# Altium PCB Deploy.PcbDoc
Units mm, origin at the board's own origin, x right, y up, seen from the top; angles counter-clockwise.
Board outline 60 x 60 mm, 2 copper layers (Top Layer, Bottom Layer); 49 components, 40 nets, 274 pads, 38 vias.
Unrouted connection lines stored in the file: 5.
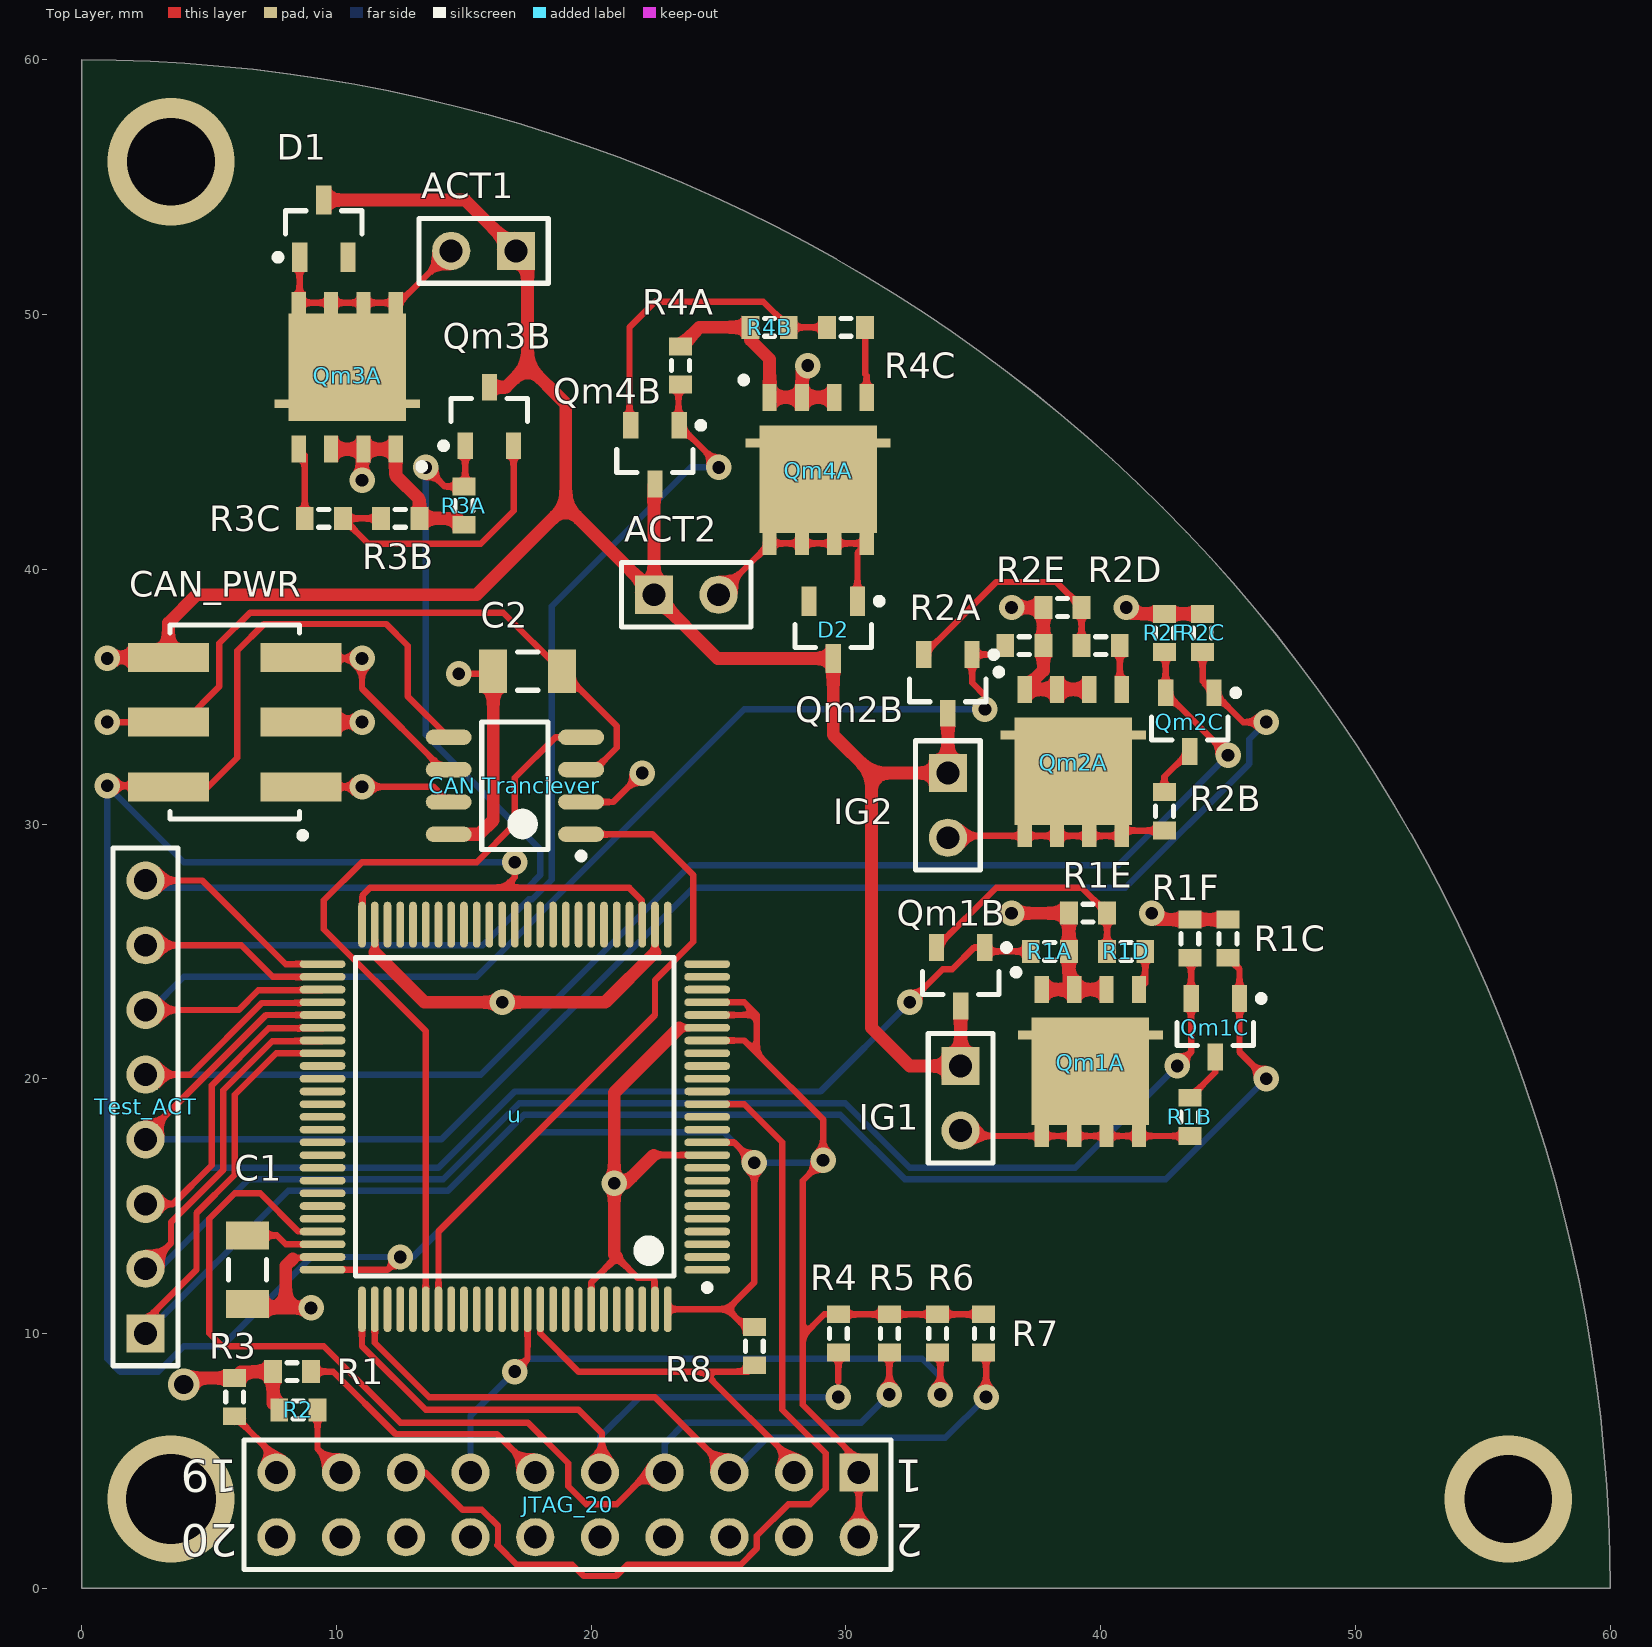
[diagram p0: Top Layer view]
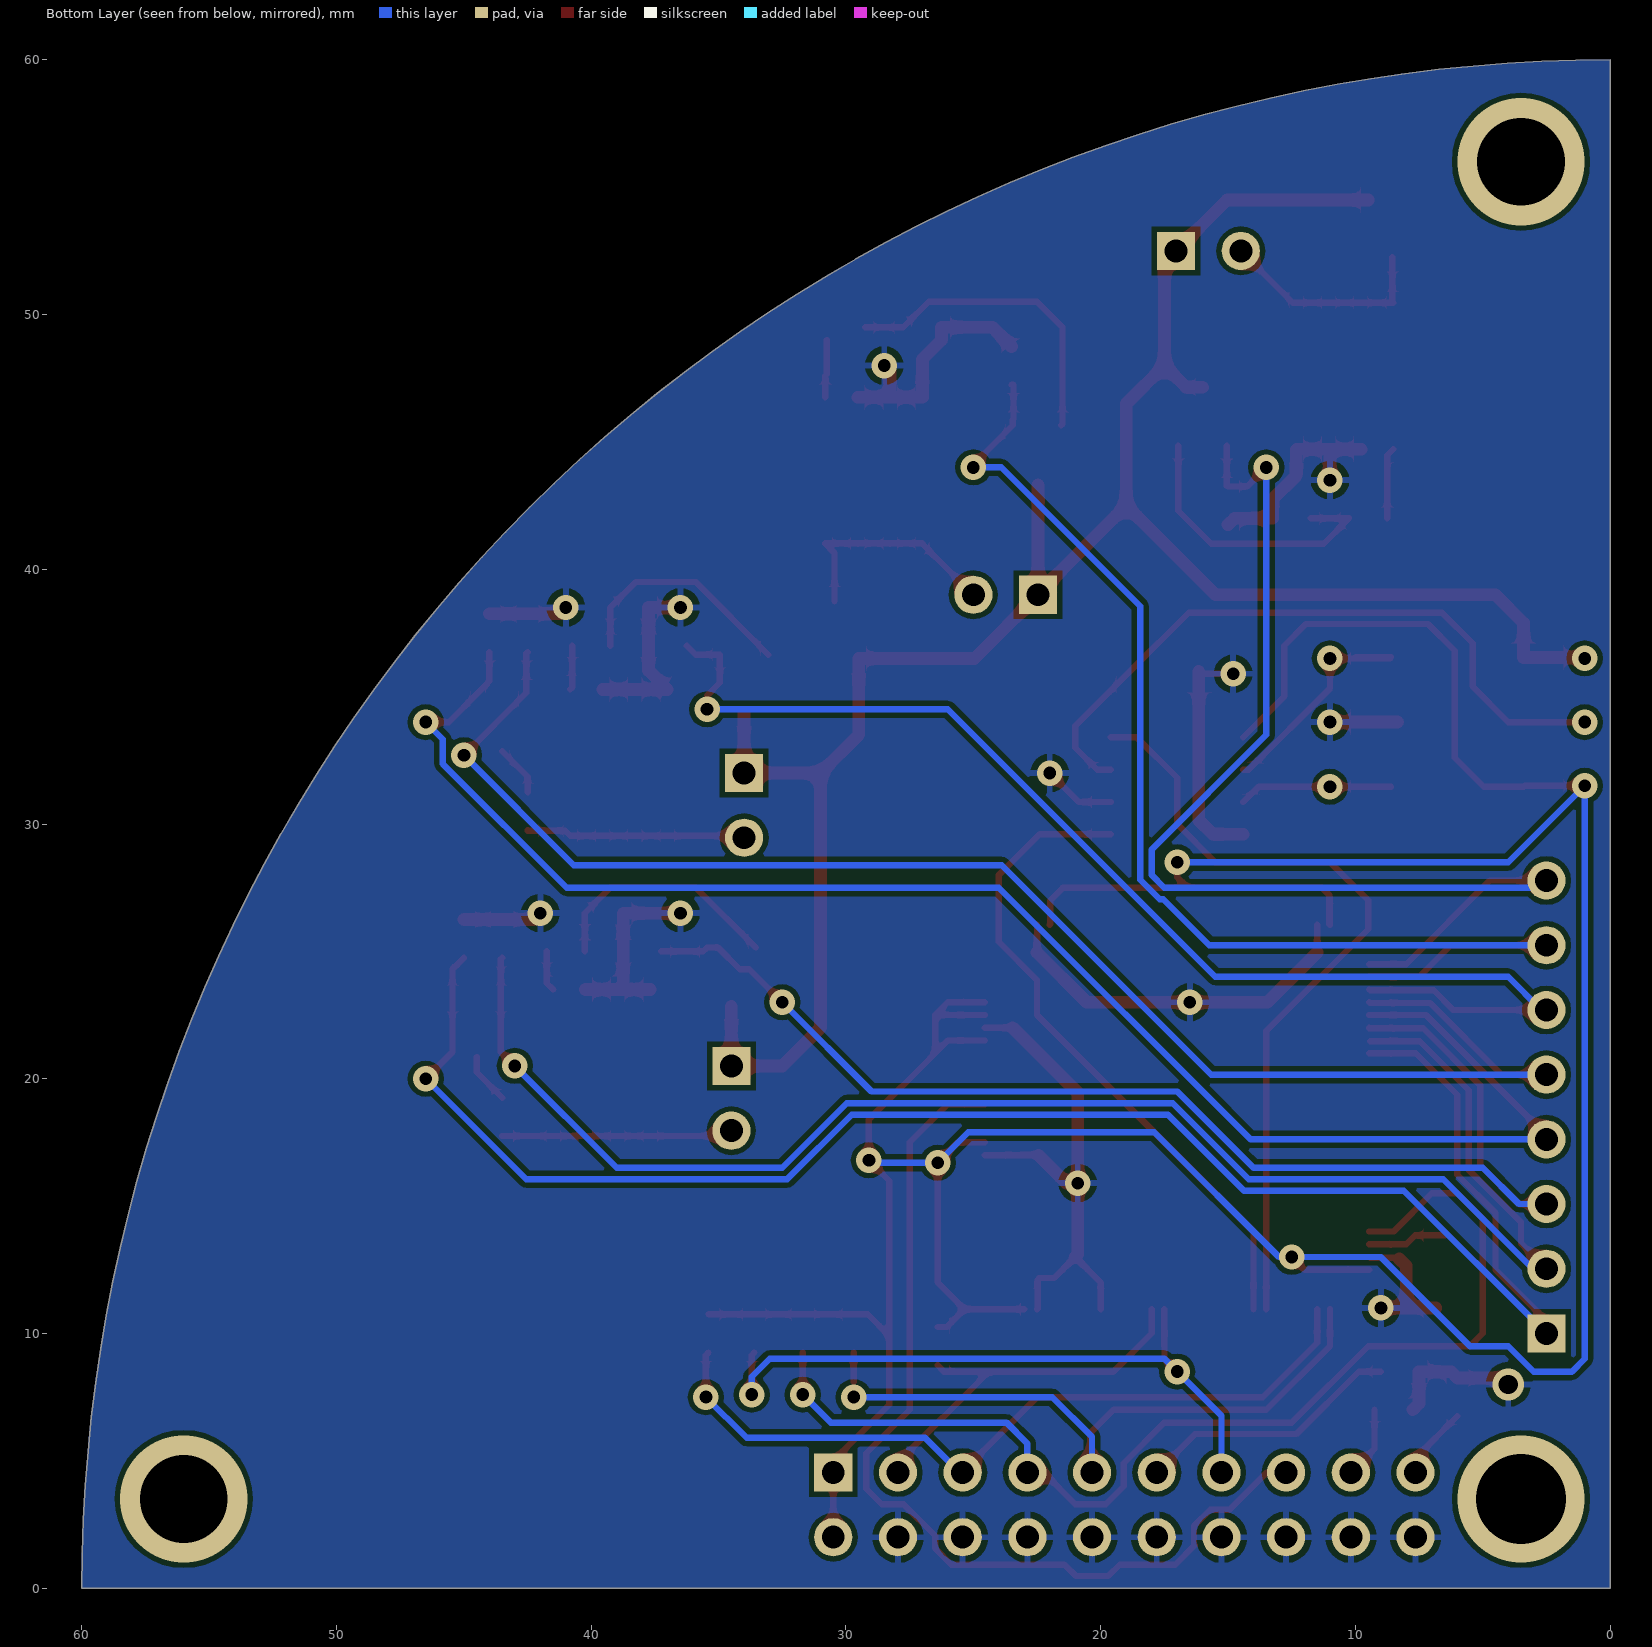
[diagram p1: Bottom Layer view, seen from below]

## Layer stack, top to bottom
Top Solder: solder mask 0.0102, Solder Resist, Dk 3.5
Top Layer: signal copper 0.0356
Dielectric 1: dielectric 0.32, FR-4, Dk 4.8
Bottom Layer: signal copper 0.0356
Bottom Solder: solder mask 0.0102, Solder Resist, Dk 3.5

## Board outline
0,60 cw(c0,0) 60,0 0,0

## Design rules (kind name [scope] priority, off if disabled: settings)
Clearance [All] p1: gap=0.2
Clearance Clearance_PWR [(InNet('ACT 12V') OR InNet('GND'))] p2: gap=0.25
ComponentClearance [All] p1: gap=0.25 collisioncheckmode=3 verticalgap=0.25 showdistances=FALSE
Height [All] p1: minheight=0 maxheight=30 prefheight=12.7
HoleSize [All] p1: absolutevalues=TRUE maxlimit=5 minlimit=0.025 maxpercent=80.000 minpercent=20.000
PlaneClearance [All] p1: clearance=1
PlaneConnect [All] p1: planeconnectstyle=Relief reliefexpansion=0.5 reliefentries=4 reliefconductorwidth=0.25 reliefairgap=0.25
PolygonConnect [All] p1: connectstyle=Relief reliefconductorwidth=0.25 reliefentries=4 polygonreliefangle="90 Angle" airgapwidth=0.25
RoutingCorners [All] p1: cornerstyle=45-Degree minsetback=0.25 maxsetback=0.25
RoutingVias [All] p1: holewidth=0.5 width=1 viastyle="Through Hole" minholewidth=0.5 minwidth=1 maxholewidth=0.5 maxwidth=1
SilkToSilkClearance [All] p1: silktosilkclearance=0
SolderMaskExpansion [All] p1: expansion=0.1
Width Width_PWR [(InNet('ACT 12V') OR InNet('GND'))] p1: maxlimit=0.5 minlimit=0.25 preferedwidth=0.5 minimp=50.000000 maximp=50.000000 favimp=50.000000
Width [All] p2: maxlimit=0.25 minlimit=0.25 preferedwidth=0.25
23 further rules are at their usual default settings.

## Classes and differential pairs
net class PWR: GND NetACT1_2 NetACT2_2
component class Actuators: ACT1 ACT2 D1 D2 IG1 IG2 Qm1A Qm1B Qm1C Qm2A Qm2B Qm2C Qm3A Qm3B Qm4A Qm4B R1A R1B R1C R1D R1E R1F R2A R2B R2C R2D R2E R2F R3A R3B R3C R4A R4B R4C
component class Sheet1: C1 C2 "CAN Tranciever" CAN_PWR JTAG_20 R1 R2 R3 R4 R5 R6 R7 R8 u

## Components (designator, comment, footprint, x,y, rotation, side; value= is the part's Value field where it differs from the comment)
ACT1 "Header 2" HDR1X2 17.04,52.5 r180 top
ACT2 "Header 2" HDR1X2 22.46,39 r0 top
C1 "Cap Semi" C1206 6.5,12.5 r270 top
C2 "Cap Semi" C1206 17.5,36 r0 top
"CAN Tranciever" "TLE8250GVIO" INF-PG-DSO-8-16_N 17,31.5 r180 top
CAN_PWR "HW-03-20-G-D-1000-SM" SMTC-HW-03-20-X-D-1000-SM 6,34 r90 top
D1 "Diode BAS116" SOT-23_N 9.5,53.375 r90 top
D2 "Diode BAS116" SOT-23_N 29.5,37.625 r270 top
IG1 "Header 2" HDR1X2 34.5,20.5 r270 top
IG2 "Header 2" HDR1X2 34,32 r270 top
JTAG_20 "Header 10X2" HDR2X10 30.5,4.54 r180 top
Qm1A "MCP87018T-U/MF" MCHP-PDFN-MF8_V 39.595,20.625 r0 top
Qm1B "BSS316N" INF-PG-SOT23_N 34.5,24 r270 top
Qm1C "BSS316N" INF-PG-SOT23_N 44.5,22 r270 top
Qm2A "MCP87018T-U/MF" MCHP-PDFN-MF8_V 38.92,32.41 r0 top
Qm2B "BSS316N" INF-PG-SOT23_N 34,35.5 r270 top
Qm2C "BSS316N" INF-PG-SOT23_N 43.5,34 r270 top
Qm3A "MCP87018T-U/MF" MCHP-PDFN-MF8_V 10.42,47.59 r180 top
Qm3B "BSS316N" INF-PG-SOT23_N 16,46 r90 top
Qm4A "MCP87018T-U/MF" MCHP-PDFN-MF8_V 28.905,43.875 r0 top
Qm4B "BSS316N" INF-PG-SOT23_N 22.5,44.5 r270 top
R1 "RTCK PD" J1-0603 8.25,8.5 r0 top
R1A "Res3" J1-0603 38,25 r180 top
R1B "Res3" J1-0603 43.5,18.5 r270 top
R1C "Res3" J1-0603 45,25.5 r270 top
R1D "Res3" J1-0603 41,25 r180 top
R1E "Res3" J1-0603 39.5,26.5 r0 top
R1F "Res3" J1-0603 43.5,25.5 r270 top
R2 "DBGRQ PD" J1-0603 8.5,7 r0 top
R2A "Res3" J1-0603 37,37 r180 top
R2B "Res3" J1-0603 42.5,30.5 r270 top
R2C "Res3" J1-0603 44,37.5 r270 top
R2D "Res3" J1-0603 40,37 r180 top
R2E "Res3" J1-0603 38.5,38.5 r0 top
R2F "Res3" J1-0603 42.5,37.5 r270 top
R3 "DBGACK PD" J1-0603 6,7.5 r270 top
R3A "Res3" J1-0603 15,42.5 r90 top
R3B "Res3" J1-0603 12.5,42 r180 top
R3C "Res3" J1-0603 9.5,42 r0 top
R4 "RTCK PD" J1-0603 29.7,10 r90 top
R4A "Res3" J1-0603 23.5,48 r270 top
R4B "Res3" J1-0603 27,49.5 r0 top
R4C "Res3" J1-0603 30,49.5 r180 top
R5 "RTCK PD" J1-0603 31.7,10 r90 top
R6 "RTCK PD" J1-0603 33.6,10 r90 top
R7 "RTCK PD" J1-0603 35.4,10 r90 top
R8 "RTCK PD" J1-0603 26.4,9.5 r90 top
Test_ACT "Comment" HDR1X8 2.5,10 r90 top
u "STM32F417VET6" STM-LQFP100_N 17,18.5 r180 top

## Footprints (in the part's own frame and the unit in brackets; to place one, negate y for a bottom-side part, rotate by r counter-clockwise, add the part's x,y. Pads: shape width x height; smd on the part's side, far side on the other; paste and mask are expansions set on the pad)
C1206 [mm] "Chip Capacitor, Body 3.2x1.6mm, IPC High Density"
  rect 1.1x1.7 smd: 1(-1.35,0) 2(1.35,0)
  silkscreen extent -0.4,-0.75 0.4,0.75, body extent -1.7,-0.9 1.7,0.9, height 1.3
HDR1X2 [mm] "Connector; Header; 2 Position"
  rect 1.5x1.5 hole 0.9: 1(0,0)
  round 1.5 hole 0.9: 2(2.54,0)
  silkscreen extent -1.27,-1.27 3.81,1.27
HDR1X8 [mm] "Connector; Header; 8 Position"
  rect 1.5x1.5 hole 0.9: 1(0,0)
  round 1.5 hole 0.9: 2(2.54,0) 3(5.08,0) 4(7.62,0) 5(10.16,0) 6(12.7,0) 7(15.24,0) 8(17.78,0)
  silkscreen extent -1.27,-1.27 19.05,1.27
HDR2X10 [mm] "Connector; Header; 10x2 Position"
  rect 1.5x1.5 hole 0.9: 1(0,0)
  round 1.5 hole 0.9: 2(0,2.54) 3(2.54,0) 4(2.54,2.54) 5(5.08,0) 6(5.08,2.54) 7(7.62,0) 8(7.62,2.54) 9(10.16,0) 10(10.16,2.54) 11(12.7,0) 12(12.7,2.54) 13(15.24,0) 14(15.24,2.54) 15(17.78,0) 16(17.78,2.54) 17(20.32,0) 18(20.32,2.54) 19(22.86,0) 20(22.86,2.54)
  silkscreen extent -1.27,-1.27 24.13,3.81
INF-PG-DSO-8-16_N [mm] "SOP, 8-Leads, Body 4.9x3.9mm, Pitch 1.27mm, IPC Medium Density"
  oval 1.8x0.6 smd: 1(-2.6,1.905) 2(-2.6,0.635) 3(-2.6,-0.635) 4(-2.6,-1.905) 5(2.6,-1.905) 6(2.6,-0.635) 7(2.6,0.635) 8(2.6,1.905)
  silkscreen extent -2.73,-2.5 1.3,2.88, body extent -2,-2.5 2,2.5, height 1.75
INF-PG-SOT23_N [mm] "SOT23, 3-Leads, Body 2.9x1.3mm, Pitch 0.95mm, IPC Medium Density"
  rect 1.05x0.6 smd: 1(-1.15,0.95) 2(-1.15,-0.95) 3(1.15,0)
  silkscreen extent -1.27,-1.5 0.7,1.93, body extent -0.7,-1.5 0.7,1.5, height 1.1
J1-0603 [mm] "Chip Resistor, Body 1.6x0.8mm, IPC High Density"
  rect 0.7x0.9 smd: 1(-0.75,0) 2(0.75,0)
  silkscreen extent -0.2,-0.35 0.2,0.35, body extent -0.85,-0.48 0.85,0.48, height 0.9
MCHP-PDFN-MF8_V [mm] "PDFN, 8-Leads, Body 6x5mm, Pitch 1.27mm"
  rect 0.56x1.06 smd: 1(-1.905,2.875) 2(-0.635,2.875) 3(0.635,2.875) 4(1.905,2.875)
  rect 0.56x0.86 smd: 5(1.905,-2.875) 6(0.635,-2.875) 7(-0.635,-2.875) 8(-1.905,-2.875)
  rect 4.62x4.22 smd: 9(0,-0.335)
  rect 0.54x0.35 smd: ""(-2.58,1.09) ""(2.58,1.09)
  silkscreen extent -3.04,3.43 -2.79,3.68, body extent -2.5,-3 2.5,3, height 1.03
SMTC-HW-03-20-X-D-1000-SM [mm] "HW Board to Board Assembly, 2x3 Pins, Vertical, 2.54mm Pitch, Male"
  rect 1.14x3.175 smd: 1(-2.54,-2.603) 2(-2.54,2.602) 3(0,-2.603) 4(0,2.602) 5(2.54,-2.603) 6(2.54,2.602)
  silkscreen extent -4.57,-2.79 3.81,2.54, body extent -3.81,-3.68 3.81,3.68, height 27.05
SOT-23_N [mm] "SOT23, 3-Leads, Body 2.9x1.3mm, Pitch 0.95mm, Lead Span 2.5mm, IPC Medium Density"
  rect 1.15x0.6 smd: 1(-1.125,0.95) 2(-1.125,-0.95) 3(1.125,0)
  silkscreen extent -1.25,-1.5 0.7,1.92, body extent -0.7,-1.5 0.7,1.5, height 1.1
STM-LQFP100_N [mm] "Thin QFP, 100-Leads, Body 14x14mm, Pitch 0.5mm, IPC Medium Density"
  oval 1.8x0.3 smd: 1(-7.55,6) 2(-7.55,5.5) 3(-7.55,5) 4(-7.55,4.5) 5(-7.55,4) 6(-7.55,3.5) 7(-7.55,3) 8(-7.55,2.5) 9(-7.55,2) 10(-7.55,1.5) 11(-7.55,1) 12(-7.55,0.5) 13(-7.55,0) 14(-7.55,-0.5) 15(-7.55,-1) 16(-7.55,-1.5) 17(-7.55,-2) 18(-7.55,-2.5) 19(-7.55,-3) 20(-7.55,-3.5) 21(-7.55,-4) 22(-7.55,-4.5) 23(-7.55,-5) 24(-7.55,-5.5) 25(-7.55,-6) 51(7.55,-6) 52(7.55,-5.5) 53(7.55,-5) 54(7.55,-4.5) 55(7.55,-4) 56(7.55,-3.5) 57(7.55,-3) 58(7.55,-2.5) 59(7.55,-2) 60(7.55,-1.5) 61(7.55,-1) 62(7.55,-0.5) 63(7.55,0) 64(7.55,0.5) 65(7.55,1) 66(7.55,1.5) 67(7.55,2) 68(7.55,2.5) 69(7.55,3) 70(7.55,3.5) 71(7.55,4) 72(7.55,4.5) 73(7.55,5) 74(7.55,5.5) 75(7.55,6)
  oval 0.3x1.8 smd: 26(-6,-7.55) 27(-5.5,-7.55) 28(-5,-7.55) 29(-4.5,-7.55) 30(-4,-7.55) 31(-3.5,-7.55) 32(-3,-7.55) 33(-2.5,-7.55) 34(-2,-7.55) 35(-1.5,-7.55) 36(-1,-7.55) 37(-0.5,-7.55) 38(0,-7.55) 39(0.5,-7.55) 40(1,-7.55) 41(1.5,-7.55) 42(2,-7.55) 43(2.5,-7.55) 44(3,-7.55) 45(3.5,-7.55) 46(4,-7.55) 47(4.5,-7.55) 48(5,-7.55) 49(5.5,-7.55) 50(6,-7.55) 76(6,7.55) 77(5.5,7.55) 78(5,7.55) 79(4.5,7.55) 80(4,7.55) 81(3.5,7.55) 82(3,7.55) 83(2.5,7.55) 84(2,7.55) 85(1.5,7.55) 86(1,7.55) 87(0.5,7.55) 88(0,7.55) 89(-0.5,7.55) 90(-1,7.55) 91(-1.5,7.55) 92(-2,7.55) 93(-2.5,7.55) 94(-3,7.55) 95(-3.5,7.55) 96(-4,7.55) 97(-4.5,7.55) 98(-5,7.55) 99(-5.5,7.55) 100(-6,7.55)
  silkscreen extent -7.68,-6.25 6.25,6.82, body extent -7,-7 7,7, height 1.6

## Part data
ACT1 ACT2 IG1 IG2: "Header, 2-Pin"
C1 C2: "Capacitor (Semiconductor SIM Model)"
"CAN Tranciever": "High Speed CAN-Transceiver, 1 Mbit/s Transmission Rate, PG-DSO-8-16, Reel, Green"
CAN_PWR: "Flexible .025\" SQ Board Stacker, Surface Mount, Vertical, -55 to 125 degC, 2.54 mm Pitch, 6-Pin, Male, RoHS"
D1 D2: "Silicon Low Leakage Diode"
JTAG_20: "Header, 10-Pin, Dual row"
Qm1A Qm2A Qm3A Qm4A: "High-Speed N-Channel Power MOSFET, Single Configuration, 25 V, -55 to 150 degC, 8-pin PDFN (MF8), Tape and Reel"
Qm1B Qm1C Qm2B Qm2C Qm3B Qm4B: "N-Channel OptiMOS 2 Small-Signal-Transistor, 30 V VDS, 1.4 A ID, -55 to 150 degC, PG-SOT23, Reel, Green"
R1 R2 R3 R4 R5 R6 R7 R8: library part Res3, "Resistor"
R1A R1B R1C R1D R1E R1F R2A R2B R2C R2D R2E R2F R3A R3B R3C R4A R4B R4C: "Resistor"
Test_ACT: library part "Header 8"
u: "ARM Cortex-M4 32-bit MCU+FPU, 210 DMIPS, 512 kB Flash, 192 kB Internal RAM, 82 I/Os, 100-pin LQFP, -40 to 85 degC, Tray"

## Via types
v1: diameter 1, hole 0.5, Top Layer to Bottom Layer, 33 vias
v2: diameter 5, hole 3.45, Top Layer to Bottom Layer, 2 vias
v3: diameter 1.25, hole 0.75, Top Layer to Bottom Layer, 1 vias
v4: diameter 5, hole 3.54, Top Layer to Bottom Layer, 1 vias
v5: diameter 1/1 (per signal layer), hole 0.5, Top Layer to Bottom Layer, 1 vias

## Nets (pads, with @x,y where several pads share a name; then routed paths per layer and width w, separated by ;. In a path a pad name is that pad's centre, name@x,y a point inside that pad or via, vN(x,y) a via of type N, cw(c..) or ccw(c..) an arc to the next point about the centre after c; other vN are vias at no path point)
"ACT 12V": ACT1.1 ACT2.1 CAN_PWR.6 D1.3 D2.3 IG1.1 IG2.1 Qm1B.3 Qm2B.3 Qm3B.3 Qm4B.3 | length 85.8
  Top Layer w0.5: v1(1,36.5) 1.04,36.54 CAN_PWR.6 3.398,37.898 4.5,39 15.5,39 19,42.5 ; D1.3 15.04,54.5 ACT1.1 ; Qm3B.3 16.65,47.15 17.5,48 ; ACT1.1@17.5,52.04 17.5,48 ; ACT2.1 24.96,36.5 D2.3 29.5,33.5 31,32 ; Qm4B.3@22.46,43.31 22.46,39.04 19,42.5 ; Qm2B.3 IG2.1 31,32 ; Qm1B.3 IG1.1 32.5,20.5 31,22 31,32 ; 17.5,48 19,46.5 19,42.5
CAN_5V: "CAN Tranciever.3" C2.2 CAN_PWR.4 | length 27.2
  Top Layer w0.25: v1(1,34) 4,34 5.4,35.4 5.4,37.1 6.6,38.3 16.55,38.3 C2.2 21,33.85 21,33 20.135,32.135 19.6,32.135
GND: "CAN Tranciever.2" "CAN Tranciever.8" C1.2 C2.1 CAN_PWR.3 JTAG_20.4 JTAG_20.6 JTAG_20.8 JTAG_20.10 JTAG_20.12 JTAG_20.14 JTAG_20.16 JTAG_20.18 JTAG_20.20 Qm1A.1 Qm1A.2 Qm1A.3 Qm2A.1 Qm2A.2 Qm2A.3 Qm3A.1 Qm3A.2 Qm3A.3 Qm4A.1 Qm4A.2 Qm4A.3 R1.1 R1A.1 R1C.1 R1E.1 R1F.1 R2.1 R2A.1 R2C.1 R2E.1 R2F.1 R3.1 R3A.1 R3B.1 R4A.1 R4B.1 u.10 u.20 u.27 u.49 u.74 u.94 u.99 | length 101.5
  Top Layer w0.25: 8.276,12.925 8.453,12.925 8.453,12.975 9.425,12.975 u.74 ; 11.5,24.951 u.49 ; v1(14.8,35.9) 16.05,35.9 C2.1 ; 19.6,30.865 20.865,30.865 v5(22,32) ; u.94 20,12 21,13 21.825,12.175 22.414,12.175 22.475,12.114 22.475,10.975 u.99 ; 22.451,17 u.10 ; 22.5,24.951 u.27 ; 23.451,22 u.20
  Top Layer w0.5: v3@4.25,7.75 v3(4,8) 4.25,8.25 R3.1 6.25,8.5 R1.1 7.5,7.25 R2.1 ; C1.2@6.85,11 8,11 ; 8.276,12.925 8,12.649 8,11 ; CAN_PWR.3@8.349,34 CAN_PWR.3 v1(11,34) ; v1(9,11) 8,11 ; Qm3A.3 Qm3A.2 ; v1(11,43.5) 11,44.66 Qm3A.2 ; 11.5,24.951 13.451,23 v1(16.5,23) 20.549,23 22.5,24.951 ; Qm3A.1@12.301,44.715 Qm3A.2 ; Qm3A.1@12.325,44.691 12.325,43.675 13.25,42.75 R3B.1 14.75,42 R3A.1 ; 14.4,29.595 15.595,29.595 16.15,30.15 C2.1 ; 21,13 20.9,13.1 v1(20.9,15.9) ; 22.451,17 21.351,15.9 v1(20.9,15.9) ; 23.451,22 20.9,19.448 v1(20.9,15.9) ; R4A.1 24.25,49.5 R4B.1 26.25,49 27,48.25 Qm4A.1 Qm4A.2 ; v1(28.5,48) 28.27,47.77 Qm4A.2 ; Qm4A.3 Qm4A.2 ; v1(36.5,26.5) R1E.1 R1A.1 38.75,23.71 Qm1A.2 ; v1(36.5,38.5) R2E.1 R2A.1 37.75,36.02 Qm2A.1 Qm2A.2 Qm2A.3 ; Qm1A.1 Qm1A.2 ; Qm1A.3 Qm1A.2 ; v1(41,38.5) 41.25,38.25 R2F.1 R2C.1 ; v1(42,26.5) 42.25,26.25 R1F.1 R1C.1
NetACT1_2: ACT1.2 D1.1 Qm3A. Qm3A.5 Qm3A.6 Qm3A.7 Qm3A.8 Qm3A.9 | length 8.6
  Top Layer w0.25: D1.1 8.55,50.5 Qm3A.5 Qm3A.6 Qm3A.7 Qm3A.8 12.465,50.465 ACT1.2
NetACT2_2: ACT2.2 D2.1 Qm4A. Qm4A.5 Qm4A.6 Qm4A.7 Qm4A.8 Qm4A.9 | length 9.1
  Top Layer w0.25: ACT2.2 Qm4A.8 27,41.016 Qm4A.7@28.27,41.016 ; Qm4A.7 Qm4A.7@28.27,41.016 ; Qm4A.6 Qm4A.6@29.54,41.016 ; D2.1 30.45,40.64 Qm4A.5 30.81,41.016 Qm4A.6@29.54,41.016 ; Qm4A.7@28.27,41.016 Qm4A.6@29.54,41.016
NetC1_1: C1.1 u.73 | length 3.1
  Top Layer w0.25: C1.1 7.65,13.85 8,13.5 u.73
"NetCAN Tranciever_1": "CAN Tranciever.1" u.82 | length 26.3
  Top Layer w0.25: u.82 14,14 22.5,22.5 22.5,23.872 24,25.372 24,28 22.405,29.595 19.6,29.595
"NetCAN Tranciever_4": "CAN Tranciever.4" u.81 | length 31.5
  Top Layer w0.25: u.81 13.5,21.872 9.5,25.872 9.5,27 11,28.5 15.5,28.5 17,30 17,31.81 18.595,33.405 19.6,33.405
NetCAN_PWR_1: "CAN Tranciever.7" CAN_PWR.1 | length 6
  Top Layer w0.25: CAN_PWR.1 v1(11,31.46) 13.805,31.46 14.4,30.865
NetCAN_PWR_5: "CAN Tranciever.6" CAN_PWR.5 | length 9.7
  Top Layer w0.25: CAN_PWR.5@9.995,36.54 CAN_PWR.5 8.643,36.5 v1(11,36.5) 11,35.321 14.186,32.135 14.4,32.135
NetIG1_2: IG1.2 Qm1A. Qm1A.5 Qm1A.6 Qm1A.7 Qm1A.8 Qm1A.9 R1B.2 | length 9.1
  Top Layer w0.25: IG1.2 34.71,17.75 Qm1A.8 Qm1A.7 Qm1A.6 Qm1A.5 R1B.2
NetIG2_2: IG2.2 Qm2A. Qm2A.5 Qm2A.6 Qm2A.7 Qm2A.8 Qm2A.9 R2B.2 | length 8.6
  Top Layer w0.25: IG2.2 34.075,29.535 Qm2A.8 Qm2A.7 Qm2A.6 Qm2A.5 41.03,29.74 42.49,29.74 R2B.2
NetJTAG_20_3: JTAG_20.3 R8.1 u.90 | length 15.5
  Top Layer w0.25: u.90 18,10 19.5,8.5 24.4,8.5 ; R8.1 26.15,8.5 24.4,8.5 ; JTAG_20.3 27.96,4.94 24.4,8.5
NetJTAG_20_5: JTAG_20.5 R7.1 u.77 | length 30.6
  Top Layer w0.25: u.77 11.5,9.636 13.636,7.5 22.5,7.5 25.5,4.5 JTAG_20.5 ; R7.1 35.5,9.15 v1(35.5,7.5)
  Bottom Layer w0.25: JTAG_20.5 25.54,4.54 26.9,5.9 33.9,5.9 v1(35.5,7.5)
NetJTAG_20_7: JTAG_20.7 R5.1 u.72 | length 44.2
  Top Layer w0.25: u.72 8.5,14 7,15.5 6,15.5 5,14.5 5,10 5.5,9.5 9.5,9.5 12.5,6.5 17.5,6.5 19.1,4.9 19.1,4 19.8,3.3 21,3.3 22.2,4.5 22.96,4.5 JTAG_20.7 ; v1(31.7,7.6) R5.1
  Bottom Layer w0.25: JTAG_20.7 22.88,5.68 23.7,6.5 30.6,6.5 v1(31.7,7.6)
NetJTAG_20_9: JTAG_20.9 R4.1 u.76 | length 26.5
  Top Layer w0.25: u.76 11,9.5 13.5,7 19.5,7 20.42,6.08 20.42,4.5 JTAG_20.9 ; 29.7,8.1 R4.1
  Bottom Layer w0.25: JTAG_20.9 20.34,5.94 21.9,7.5 v1(29.7,7.5)
NetJTAG_20_11: JTAG_20.11 R1.2 | length 10.4
  Top Layer w0.25: R1.2 9.864,8.5 12.314,6.05 16.29,6.05 JTAG_20.11
NetJTAG_20_13: JTAG_20.13 R6.1 u.89 | length 27
  Top Layer w0.25: JTAG_20.13 JTAG_20.13@15.34,4.5 ; v1(17,8.504) 17.498,9.002 17.498,9.5 ; 17.5,9.5 u.89 ; R6.1 33.7,9.15 v1(33.7,7.6)
  Bottom Layer w0.25: JTAG_20.13 15.26,6.764 v1(17,8.504) 17.496,9 33,9 33.7,8.3 v1(33.7,7.6)
NetJTAG_20_15: JTAG_20.15 u.14 | length 38.3
  Top Layer w0.25: JTAG_20.15@12.8,4.5 JTAG_20.15 13.48,4.54 14.945,3.075 15.705,3.075 16.335,2.445 16.335,1.685 ; 16.315,1.685 17.075,0.925 19.258,0.925 19.708,0.475 20.972,0.475 21.422,0.925 25.865,0.925 26.495,1.555 26.495,2.055 27.74,3.3 28.6,3.3 29.2,3.9 29.2,5.3 27.5,7 27.5,17.5 26,19 u.14
NetJTAG_20_17: JTAG_20.17 R2.2 | length 2.8
  Top Layer w0.25: R2.2 9.25,5.47 JTAG_20.17
NetJTAG_20_19: JTAG_20.19 R3.2 | length 2.9
  Top Layer w0.25: R3.2 7.64,5.11 JTAG_20.19
NetQm1A_4: Qm1A.4 R1D.1 | length 1.6
  Top Layer w0.25: Qm1A.4 41.75,23.75 R1D.1
NetQm1B_1: Qm1B.1 R1A.2 Test_ACT.3 u.56 | length 50.7
  Top Layer w0.25: Test_ACT.3 3.58,15.08 5.1,16.6 5.1,19.736 7.339,21.975 9.45,21.975 u.56 ; v1(32.5,23) 33.8,24.3 34.175,24.3 35.025,25.15 Qm1B.1 35.6,25 R1A.2
  Bottom Layer w0.25: Test_ACT.3 3.58,15.08 5,16.5 14,16.5 17,19.5 29,19.5 v1(32.5,23)
NetQm1B_2: Qm1B.2 R1D.2 R1E.2 | length 9.6
  Top Layer w0.25: Qm1B.2 35.9,27.5 39.25,27.5 R1E.2 R1D.2@40.25,25
NetQm1C_1: Qm1C.1 R1C.2 Test_ACT.1 u.58 | length 70.6
  Top Layer w0.25: Test_ACT.1 2.5,10.5 4.498,12.498 4.498,14.725 6,16.227 6,19.364 7.636,21 u.58 ; R1C.2 45.45,24.3 Qm1C.1 45.45,21.05 v1(46.5,20)
  Bottom Layer w0.25: Test_ACT.1 8.1,15.6 14.373,15.6 17.358,18.585 29.779,18.585 32.314,16.05 42.55,16.05 v1(46.5,20)
NetQm1C_2: Qm1C.2 R1F.2 Test_ACT.2 u.57 | length 63.3
  Top Layer w0.25: Test_ACT.2 3.5,13.54 3.5,14.364 5.55,16.414 5.55,19.55 7.475,21.475 u.57@9.425,21.475 ; v1(43,20.5) 43.55,21.05 Qm1C.2 43.55,24.7 R1F.2
  Bottom Layer w0.25: Test_ACT.2 3.04,12.54 6.55,16.05 14.186,16.05 17.171,19.035 29.965,19.035 32.5,16.5 39,16.5 v1(43,20.5)
NetQm1C_3: Qm1C.3 R1B.1 | length 2
  Top Layer w0.25: R1B.1 44.5,20.25 Qm1C.3
NetQm2A_4: Qm2A.4 R2D.1 | length 1.7
  Top Layer w0.25: R2D.1 40.75,35.36 Qm2A.4
NetQm2B_1: Qm2B.1 R2A.2 Test_ACT.6 u.53 | length 48.9
  Top Layer w0.25: Test_ACT.6 6.154,22.7 6.929,23.475 9.425,23.475 u.53 ; v1(35.453,34.5) 35.453,35.047 34.95,35.55 Qm2B.1 35.9,36.65 R2A.2
  Bottom Layer w0.25: Test_ACT.6 2.7,22.7 4,24 15.5,24 26,34.5 v1(35.453,34.5)
NetQm2B_2: Qm2B.2 R2D.2 R2E.2 | length 9.3
  Top Layer w0.25: Qm2B.2 35.9,39.5 38.25,39.5 R2E.2 R2D.2
NetQm2C_1: Qm2C.1 R2C.2 Test_ACT.4 u.55 | length 64.7
  Top Layer w0.25: Test_ACT.4 2.5,17.773 7.227,22.5 u.55 ; R2C.2 44,35.6 Qm2C.1 45.6,34 v1(46.5,34)
  Bottom Layer w0.25: Test_ACT.4 14.12,17.62 24,27.5 40.967,27.5 45.825,32.358 45.825,33.325 v1(46.5,34)
NetQm2C_2: Qm2C.2 R2F.2 Test_ACT.5 u.54 | length 60.9
  Top Layer w0.25: Test_ACT.5 4.251,20.16 7.066,22.975 9.425,22.975 u.54 ; R2F.2 42.55,36.7 Qm2C.2 v1(45,32.7)
  Bottom Layer w0.25: Test_ACT.5 15.66,20.16 23.885,28.385 40.685,28.385 v1(45,32.7)
NetQm2C_3: Qm2C.3 R2B.1 | length 2
  Top Layer w0.25: R2B.1 42.5,31.85 Qm2C.3
NetQm3A_4: Qm3A.4 R3C.1 | length 2.8
  Top Layer w0.25: Qm3A.4 8.75,44.48 R3C.1
NetQm3B_1: Qm3B.1 R3A.2 Test_ACT.8 u.51 | length 45.4
  Top Layer w0.25: Test_ACT.8 4.72,27.78 8,24.5 u.51 ; v1(13.5,44) 14.25,43.25 R3A.2 ; R3A.2@15.05,43.272 Qm3B.1
  Bottom Layer w0.25: Test_ACT.8 2.78,27.5 17.5,27.5 18,28 18,29 13.5,33.5 v1(13.5,44)
NetQm3B_2: Qm3B.2 R3B.2 R3C.2 | length 11.7
  Top Layer w0.25: R3B.2 R3C.2 11.242,41.008 15.656,41.008 16.95,42.302 Qm3B.2
NetQm4A_4: Qm4A.4 R4C.1 | length 2.3
  Top Layer w0.25: 30.75,49 30.75,47.654 30.81,47.594 Qm4A.4
NetQm4B_1: Qm4B.1 R4A.2 Test_ACT.7 u.52 | length 48
  Top Layer w0.25: Test_ACT.7 6.26,25.24 7.5,24 u.52 ; R4A.2 23.425,47.25 23.425,45.892 23.45,45.867 Qm4B.1 25,44.1 v1(25,44)
  Bottom Layer w0.25: Test_ACT.7 15.74,25.24 17.55,27.05 17.686,27.05 18.45,27.814 18.45,38.55 23.9,44 v1(25,44)
NetQm4B_2: Qm4B.2 R4B.2 R4C.2 | length 12.4
  Top Layer w0.25: Qm4B.2 21.5,45.7 21.5,49.5 22.5,50.5 26.75,50.5 R4B.2 R4C.2
VCC: "CAN Tranciever.5" CAN_PWR.2 JTAG_20.1 JTAG_20.2 R4.2 R5.2 R6.2 R7.2 R8.2 u.11 u.19 u.21 u.22 u.28 u.50 u.75 u.100 | length 161.7
  Top Layer w0.25: v1(1,31.5) 3.358,31.5 CAN_PWR.2 4.96,31.46 6.1,32.6 6.1,36.8 7.15,37.85 11.95,37.85 12.8,37 12.8,35.005 14.4,33.405 ; u.75 12,12.5 v1(12.5,13) ; u.50@11,26.83 u.50 11.025,26.075 11.025,27.214 11.311,27.5 16.585,27.5 ; v1(17,28.5) 17,27.915 16.585,27.5 ; u.28 21.975,26.075 21.975,26.997 21.5,27.472 21.5,27.5 16.585,27.5 ; u.100 25.35,10.95 ; u.11 25.6,17.5 v1(26.4,16.7) 26.4,12 25.35,10.95 ; u.19 26,21.5 26.5,21 ; u.21 26.5,22.5 ; u.22 26,23 26.5,22.5 ; R8.2 26.05,10.25 25.35,10.95 ; JTAG_20.2 JTAG_20.1 30.5,5 28.3,7.2 28.3,9.9 ; R7.2 R6.2 R5.2 R4.2 29.15,10.75 28.3,9.9 ; 26.5,21 29.1,18.4 v1(29.1,16.8) 28.3,16 28.3,9.9 ; 26.5,21 26.5,22.5
  Bottom Layer w0.25: v1(17,28.5) 4,28.5 v1(1,31.5) 1,9 1.5,8.5 3,8.5 4,9.5 5.5,9.5 9,13 v1(12.5,13) 13,13 17.9,17.9 25.2,17.9 v1(26.4,16.7) 29,16.7 v1(29.1,16.8) ; JTAG_20.1 JTAG_20.1@30.5,5
pads on no net: D1.2 D2.2 u.1 u.2 u.3 u.4 u.5 u.6 u.7 u.8 u.9 u.12 u.13 u.15 u.16 u.17 u.18 u.23 u.24 u.25 u.26 u.29 u.30 u.31 u.32 u.33 u.34 u.35 u.36 u.37 u.38 u.39 u.40 u.41 u.42 u.43 u.44 u.45 u.46 u.47 u.48 u.59 u.60 u.61 u.62 u.63 u.64 u.65 u.66 u.67 u.68 u.69 u.70 u.71 u.78 u.79 u.80 u.83 u.84 u.85 u.86 u.87 u.88 u.91 u.92 u.93 u.95 u.96 u.97 u.98
copper on no net:
  other v2: 56,3.5 3.5,56
  other v4: 3.5,3.5

## Polygon pours and split planes (outlines as drawn)
GND on Bottom Layer "Ground Plane" (solid, remove dead copper, pour order 2): 0,60 cw(c0,0) 60,0 0,0

## Text inside footprints (layer, text, board x,y; h text height)
JTAG_20: Top Overlay "2" at 33.04,2.508 h1.27 r180; Top Overlay "1" at 33.04,5.048 h1.27 r180; Top Overlay "19" at 6.116,5.048 h1.27 r180; Top Overlay "20" at 6.116,2.508 h1.27 r180